# Altium PCB PCB1_Finger_tremor_updated1107.PcbDoc
Units mil, origin at the board's own origin, x right, y up, seen from the top; angles counter-clockwise.
Board outline 4133.86 x 2125.98 mil, 2 copper layers (Top Layer, Bottom Layer), stack 30.8 mil thick; 15 components, 12 nets, 50 pads, 0 vias.
Unrouted connection lines stored in the file: 2.
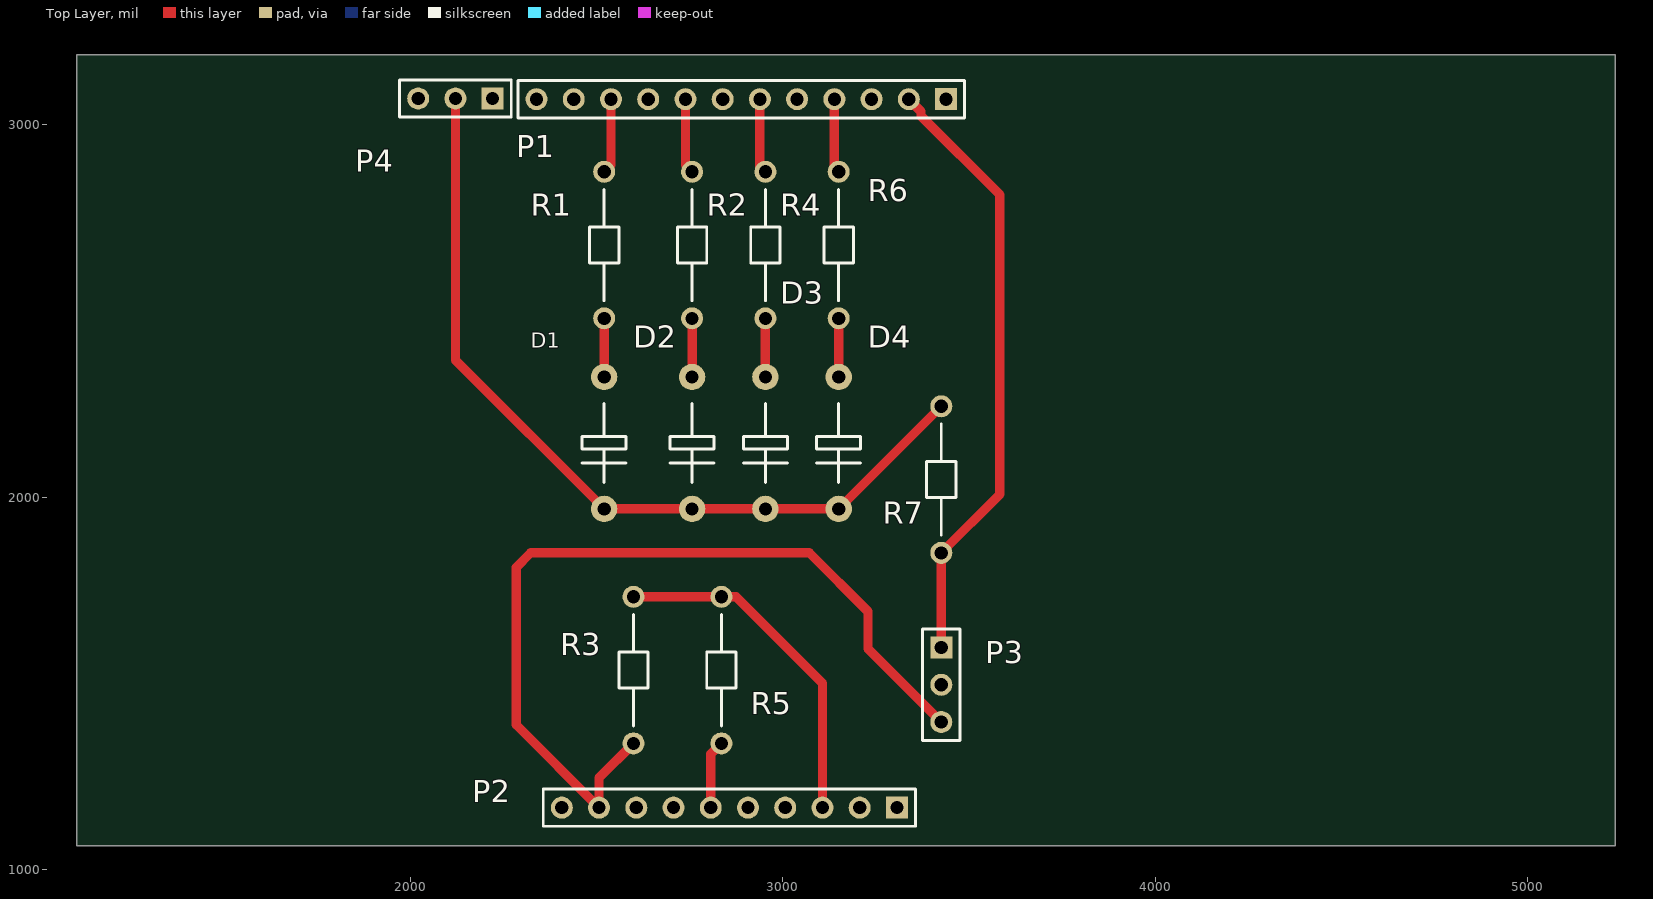
[diagram p0: Top Layer view]
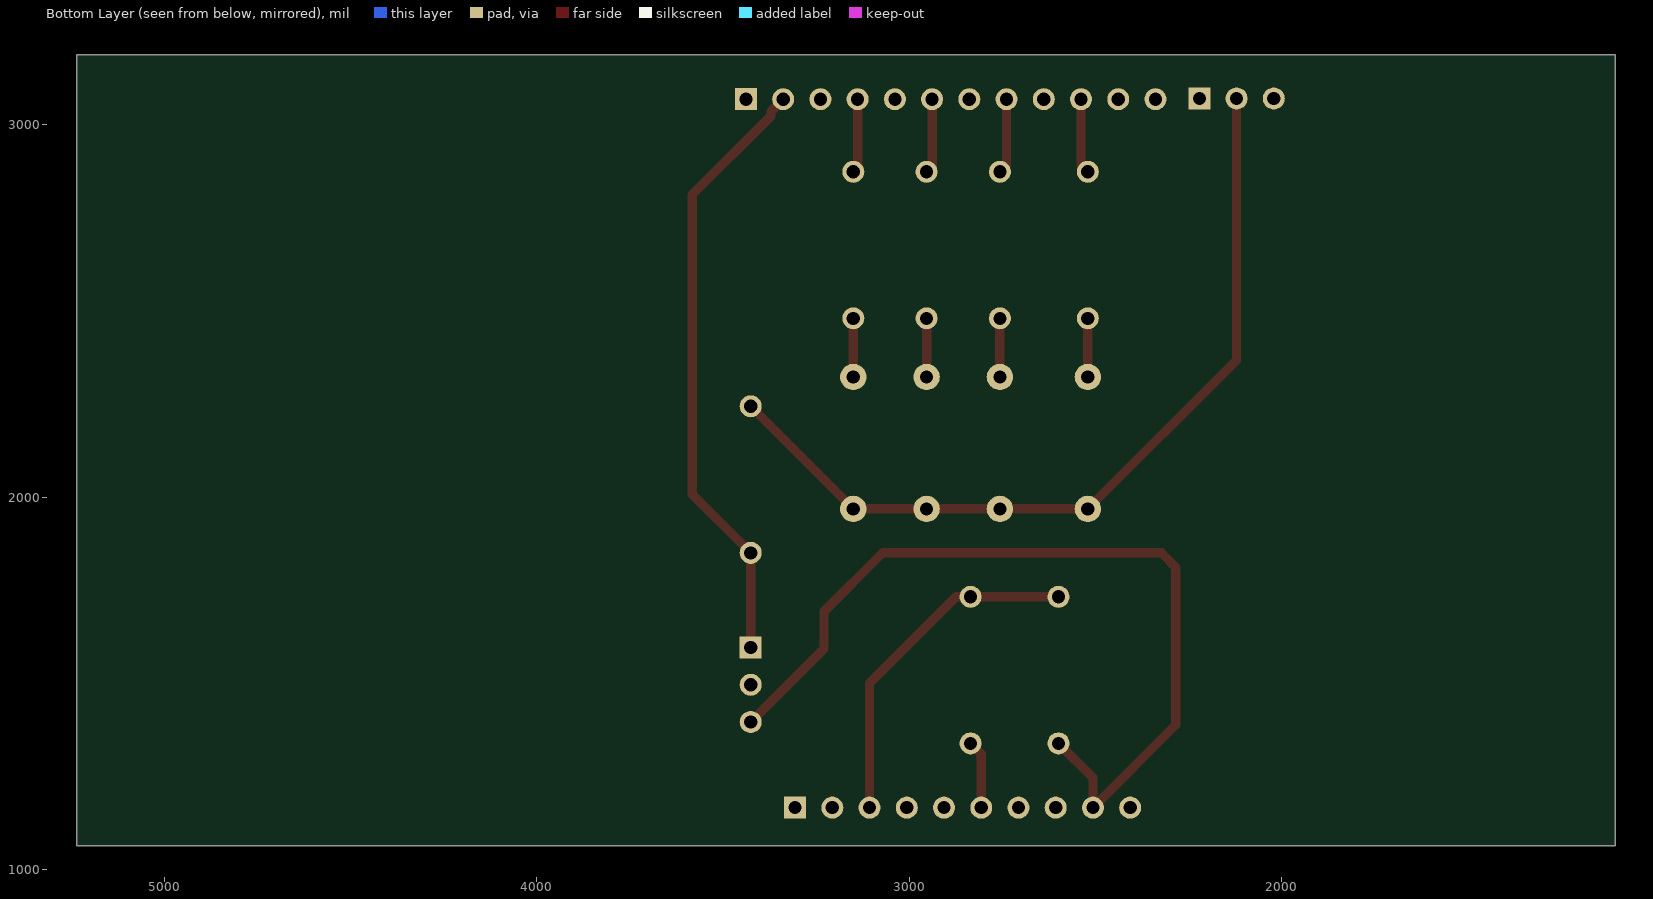
[diagram p1: Bottom Layer view, seen from below]

## Layer stack, top to bottom
Top Solder: solder mask 0.4, Solder Resist, Dk 3.5
Top Layer: signal copper 1.4
Dielectric 1: dielectric 28, FR-4, Dk 4.8
Bottom Layer: signal copper 1.4
Bottom Solder: solder mask 0.4, Solder Resist, Dk 3.5

## Board outline
1102.36,1062.99 5236.22,1062.99 5236.22,3188.98 1102.36,3188.98

## Design rules (kind name [scope] priority, off if disabled: settings)
Clearance [All] p1: gap=25 ignorepadtopadclearanceinfootprint=FALSE
PolygonConnect [All] p1: connectstyle=Relief reliefconductorwidth=10 reliefentries=4 polygonreliefangle="90 Angle" airgapwidth=10
RoutingVias [All] p1: holewidth=28 width=50 viastyle="Through Hole" minholewidth=28 minwidth=50 maxholewidth=28 maxwidth=50
SolderMaskExpansion [All] p1: expansion=4
Width [All] p1: maxlimit=25 minlimit=25 preferedwidth=25
30 further rules are at their usual default settings.

## Components (designator, comment, footprint, x,y, rotation, side; value= is the part's Value field where it differs from the comment)
D1 "1N914" Diode 2519.68,2322.83 r270 top
D2 "1N914" Diode 2755.91,2322.83 r270 top
D3 "1N914" Diode 2952.76,2322.83 r270 top
D4 "1N914" Diode 3149.61,2322.83 r270 top
P1 "Header 12" HDR1X12 3438,3069 r180 top
P2 "Header 10" HDR1X10 3306,1166 r180 top
P3 "Header 3" HDR1X3 3425.2,1596.06 r270 top
P4 "Header 3" HDR1X3 2220.12,3070.87 r180 top
R1 "Resistor" RES 2519.68,2874.02 r270 top value=220
R2 "Resistor" RES 2755.91,2874.02 r270 top value=220
R3 "Resistor" RES 2598.43,1338.58 r90 top value=20K
R4 "Resistor" RES 2952.76,2874.02 r270 top value=220
R5 "Resistor" RES 2834.65,1338.58 r90 top value=1K
R6 "Resistor" RES 3149.61,2874.02 r270 top value=220
R7 "Resistor" RES 3425.2,2244.09 r270 top value=1K

## Footprints (in the part's own frame and the unit in brackets; to place one, negate y for a bottom-side part, rotate by r counter-clockwise, add the part's x,y. Pads: shape width x height; smd on the part's side, far side on the other; paste and mask are expansions set on the pad)
Diode [mm]
  round 1.8 hole 0.9: 1(0,0) 2(9,0)
  silkscreen extent 1.8,-1.5 7.2,1.5
HDR1X3 [mm] "Connector; Header; 3 Position"
  rect 1.5x1.5 hole 0.9: 1(0,0)
  round 1.5 hole 0.9: 2(2.54,0) 3(5.08,0)
  silkscreen extent -1.27,-1.27 6.35,1.27
HDR1X10 [mm] "Connector; Header; 10 Position"
  rect 1.5x1.5 hole 0.9: 1(0,0)
  round 1.5 hole 0.9: 2(2.54,0) 3(5.08,0) 4(7.62,0) 5(10.16,0) 6(12.7,0) 7(15.24,0) 8(17.78,0) 9(20.32,0) 10(22.86,0)
  silkscreen extent -1.27,-1.27 24.13,1.27
HDR1X12 [mm] "Connector; Header; 12 Position"
  rect 1.5x1.5 hole 0.9: 1(0,0)
  round 1.5 hole 0.9: 2(2.54,0) 3(5.08,0) 4(7.62,0) 5(10.16,0) 6(12.7,0) 7(15.24,0) 8(17.78,0) 9(20.32,0) 10(22.86,0) 11(25.4,0) 12(27.94,0)
  silkscreen extent -1.27,-1.27 29.21,1.27
RES [mm]
  round 1.5 hole 0.9: 1(0,0) 2(10,0)
  silkscreen extent 1.2,-1 8.8,1

## Part data
D1 D2 D3 D4: "High Conductance Fast Diode"
P1: "Header, 12-Pin", LatestRevisionDate=17-Jul-2002, LatestRevisionNote="Re-released for DXP Platform.", Publisher="Altium Limited"
P2: "Header, 10-Pin", LatestRevisionDate=17-Jul-2002, LatestRevisionNote="Re-released for DXP Platform.", Publisher="Altium Limited"
P3 P4: "Header, 3-Pin", LatestRevisionDate=17-Jul-2002, LatestRevisionNote="Re-released for DXP Platform.", Publisher="Altium Limited"

## Nets (pads, with @x,y where several pads share a name; then routed paths per layer and width w, separated by ;. In a path a pad name is that pad's centre, name@x,y a point inside that pad or via, vN(x,y) a via of type N, cw(c..) or ccw(c..) an arc to the next point about the centre after c; other vN are vias at no path point)
GND: D1.2 D2.2 D3.2 D4.2 P2.6 P2.7 P4.2 R5.1 R7.1 | length 2472
  Top Layer w25: P4.2 2120.12,2368.07 D1.2 D2.2 D3.2 D4.2 R7.1 ; P2.6 2806,1309.94 R5.1
NetD1_1: D1.1 R1.2 | length 157.5
  Top Layer w25: D1.1 R1.2
NetD2_1: D2.1 R2.2 | length 157.5
  Top Layer w25: D2.1 R2.2
NetD3_1: D3.1 R4.2 | length 157.5
  Top Layer w25: D3.1 R4.2
NetD4_1: D4.1 R6.2 | length 157.5
  Top Layer w25: D4.1 R6.2
NetP1_2: P1.2 P3.1 R7.2 | length 1639.5
  Top Layer w25: P1.2 3370.97,3036.03 3370.97,3023.94 3582.68,2812.23 3582.68,2007.87 R7.2 P3.1
NetP1_4: P1.4 R6.1 | length 199.8
  Top Layer w25: P1.4 3138,2885.62 R6.1
NetP1_6: P1.6 R4.1 | length 201.1
  Top Layer w25: P1.6 2938,2888.77 R4.1
NetP1_8: P1.8 R2.1 | length 202.4
  Top Layer w25: P1.8 2738,2891.92 R2.1
NetP1_10: P1.10 R1.1 | length 202.6
  Top Layer w25: R1.1 2538,2892.33 P1.10
NetP2_3: P2.3 R3.2 R5.2 | length 938
  Top Layer w25: R3.2 R5.2 2874.02,1732.28 3106,1500.3 P2.3
NetP2_9: P2.9 P3.3 R3.1 | length 2352.9
  Top Layer w25: R3.1 2506,1246.16 P2.9 2283.46,1388.54 2283.46,1811.02 2322.83,1850.39 3070.87,1850.39 3228.35,1692.91 3228.35,1592.91 P3.3
pads on no net: P1.1 P1.3 P1.5 P1.7 P1.9 P1.11 P1.12 P2.1 P2.2 P2.4 P2.5 P2.8 P2.10 P3.2 P4.1 P4.3

## Silkscreen, mask and mechanical layers (free items; w line width, h text height)
Mechanical 1:
  the board outline again, w10